# Altium PCB DoorSensor-Remote_Lora.PcbDoc
Units mil, origin at the board's own origin, x right, y up, seen from the top; angles counter-clockwise.
Board outline 1518.68 x 2938.43 mil, 2 copper layers (Top Layer, Bottom Layer); 34 components, 27 nets, 102 pads, 141 vias.
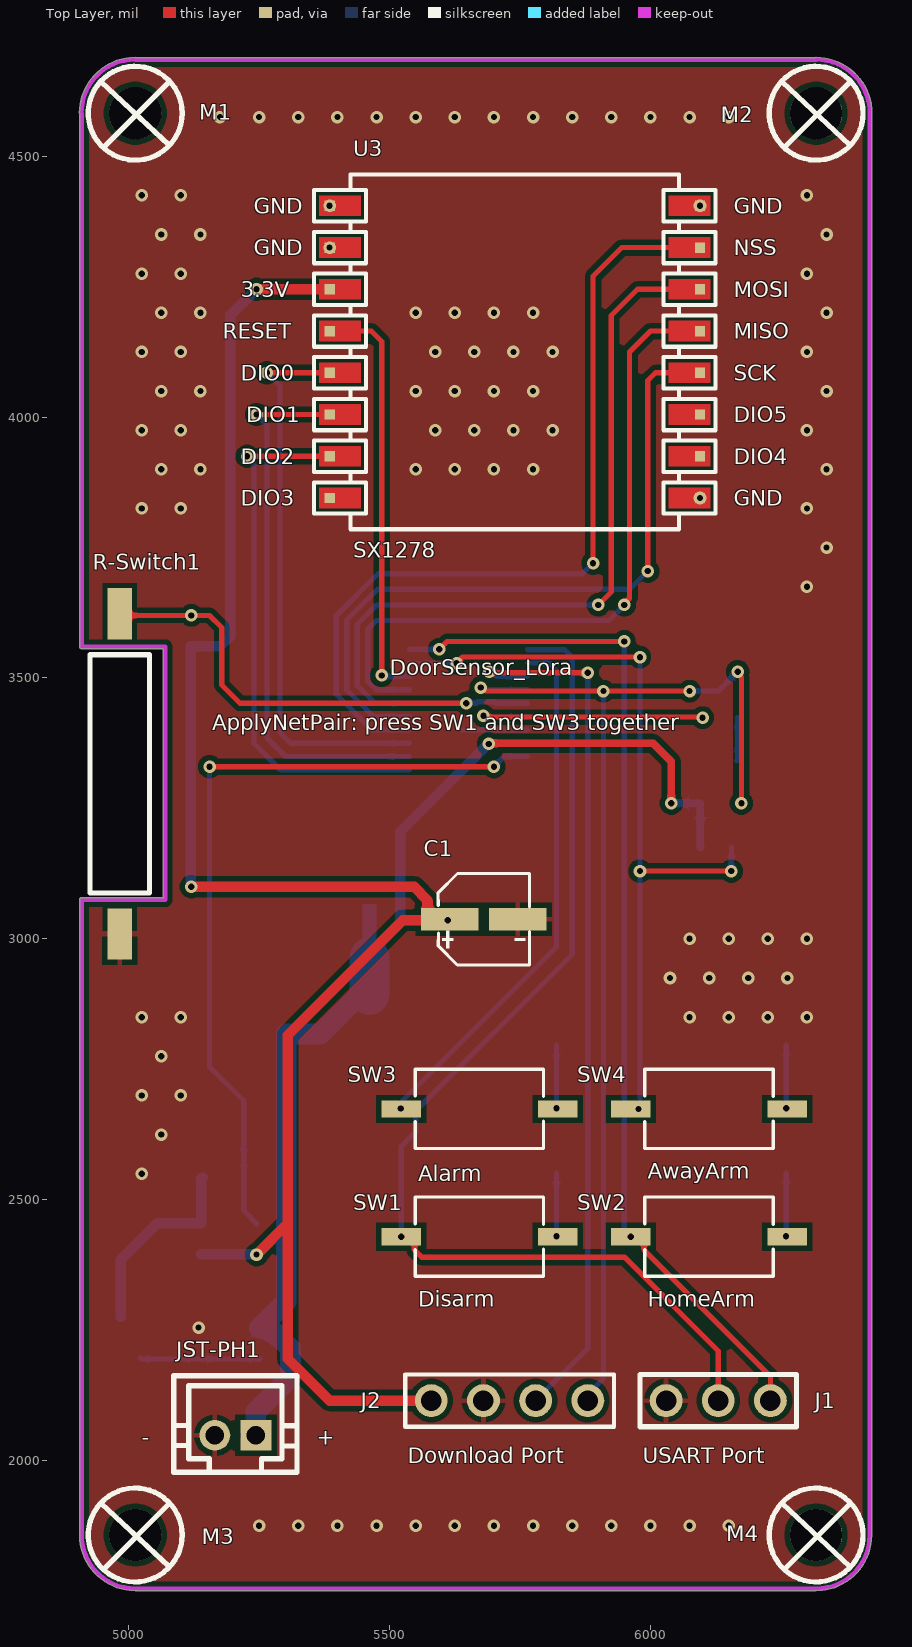
[diagram p0: Top Layer view]
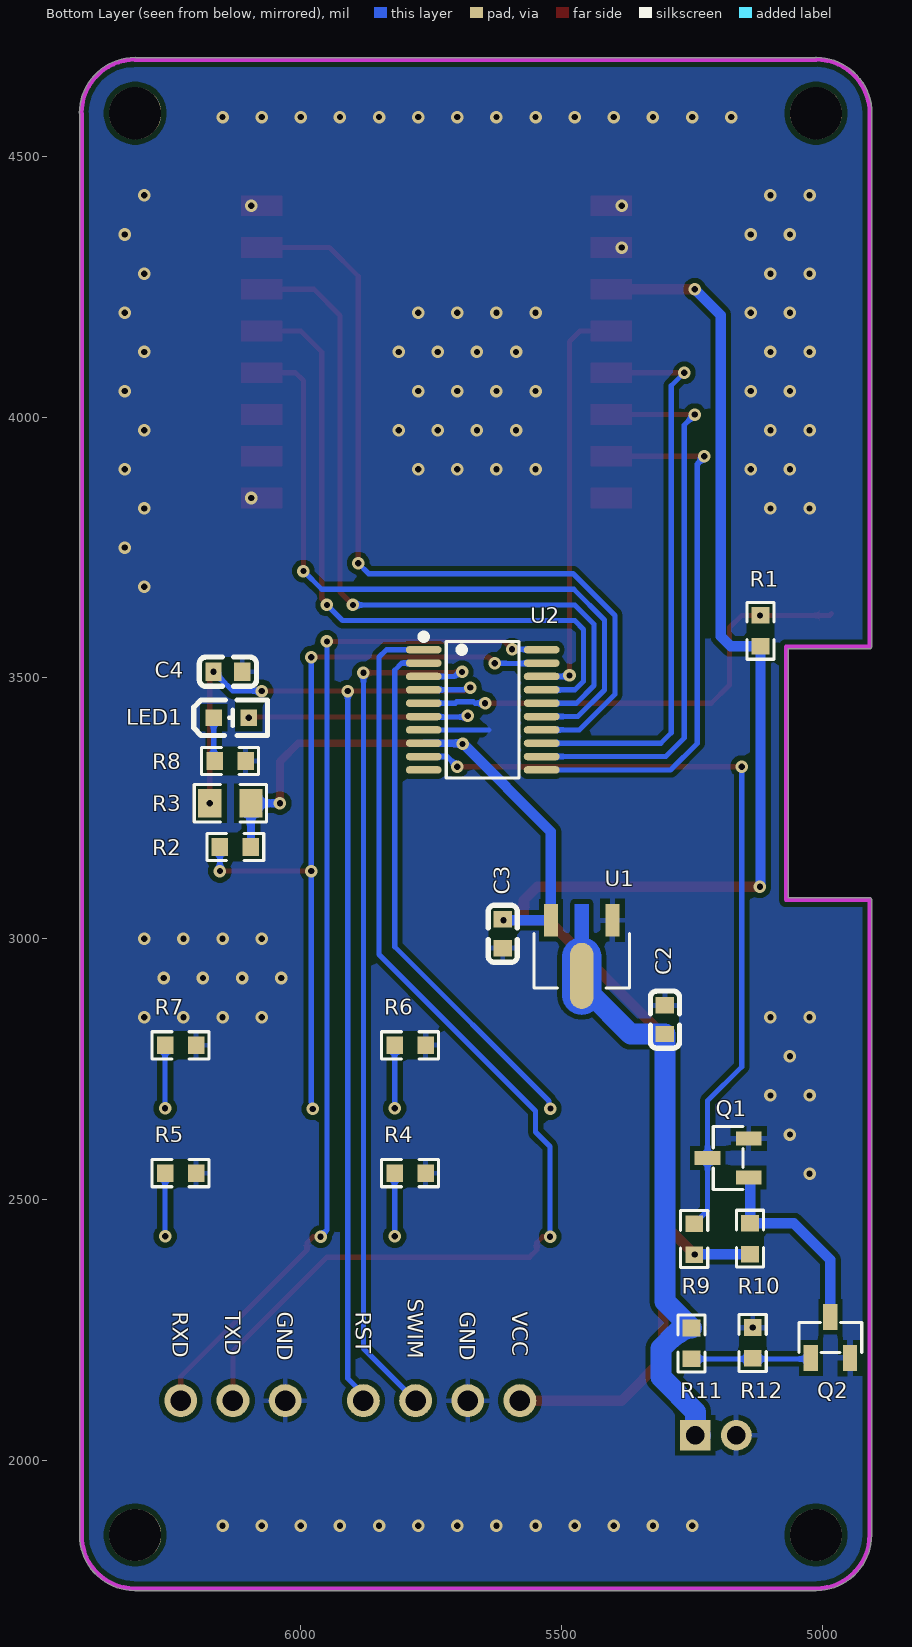
[diagram p1: Bottom Layer view, seen from below]
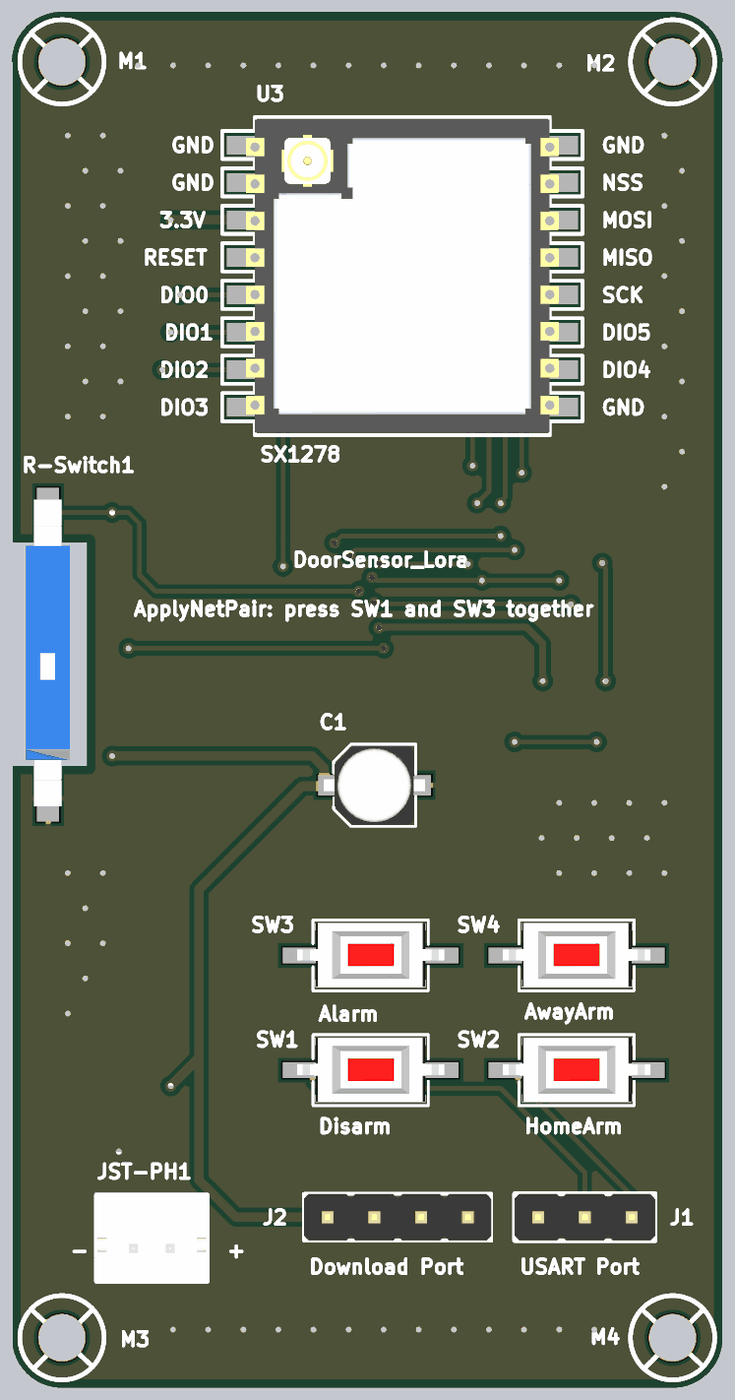
[diagram p2: 3D render of the assembled board from above, using the file's embedded part models]
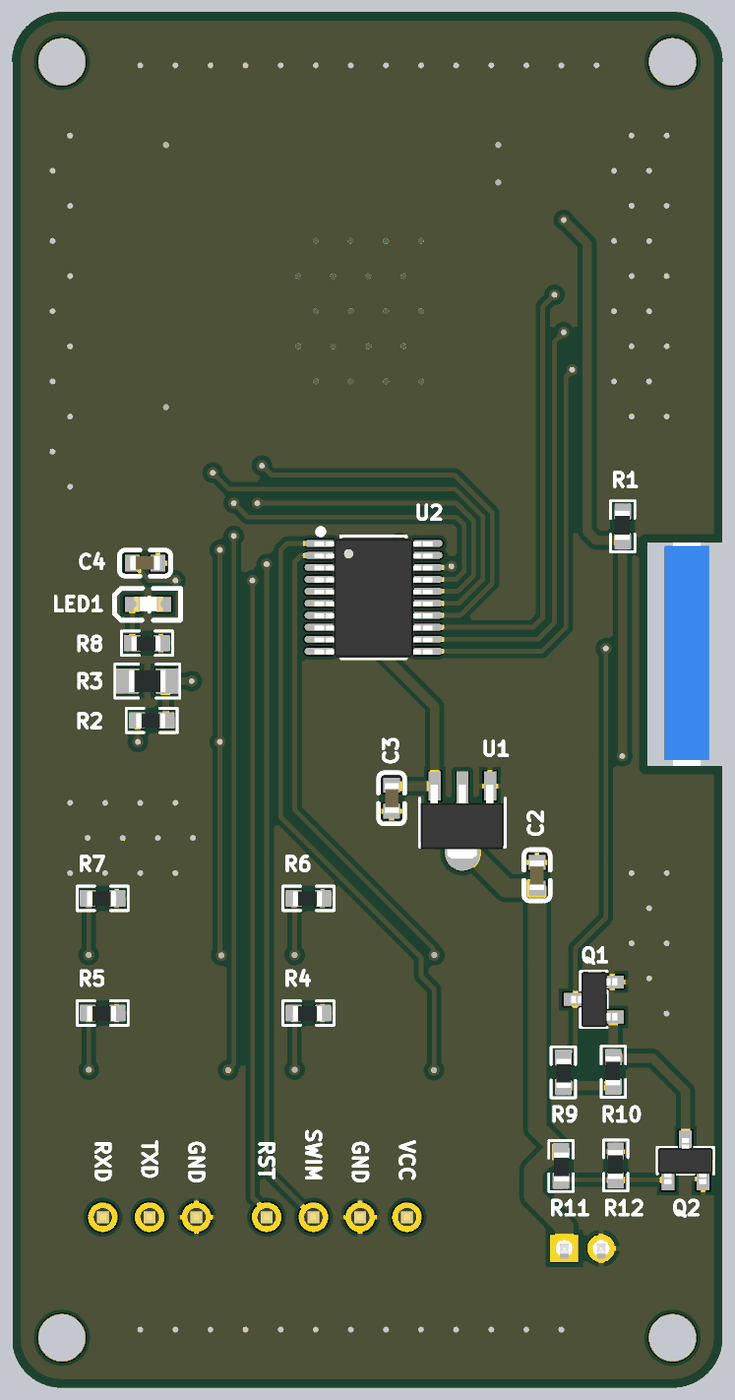
[diagram p3: 3D render of the assembled board from below, using the file's embedded part models]

## Layer stack, top to bottom
Top Solder: solder mask 0.4, Solder Resist, Dk 3.5
Top Layer: signal copper 1.4
Dielectric 1: dielectric 12.6, FR-4, Dk 4.8
Bottom Layer: signal copper 1.4
Bottom Solder: solder mask 0.4, Solder Resist, Dk 3.5

## Board outline
4905.98,1857.99 4905.98,3075 cw(c4910,3075) 4910,3079.01 5065.98,3079.01 5065.98,3555.99 4910,3555.99 cw(c4910,3560) 4905.98,3560 4905.98,4580.81 4905.61,4582.5 cw(c5012.5,4582.5) 5012.5,4689.39 5014.19,4689.02 6316.04,4689.02 6317.5,4689.29 cw(c6317.5,4582.5) 6424.29,4582.5 6424.01,4581.04 6424.02,1856.83 cw(c6318.17,1856.83) 6318.17,1750.98 5012.99,1750.99 5012.5,1750.95 cw(c5012.5,1857.5)

## Design rules (kind name [scope] priority, off if disabled: settings)
Clearance [All] p1: gap=10 ignorepadtopadclearanceinfootprint=FALSE except(0: Arc-Hole Track-Hole SMDPad-Hole THPad-Hole Via-Hole Fill-Hole Poly-Hole Region-Hole Text-Hole)
PolygonConnect PolygonConnect_Via [IsVia] p1: connectstyle=Direct reliefconductorwidth=10 reliefentries=4 polygonreliefangle="90 Angle" airgapwidth=10
PolygonConnect PolygonConnect_Pad [All] p2: connectstyle=Relief reliefconductorwidth=10 reliefentries=4 polygonreliefangle="90 Angle" airgapwidth=10
RoutingVias [All] p1: holewidth=28 width=50 viastyle="Through Hole" minholewidth=28 minwidth=50 maxholewidth=28 maxwidth=50
SolderMaskExpansion [All] p1: expansion=4 istentingtop=FALSE
Width GND [InNet('GND')] p1: maxlimit=50 minlimit=10 preferedwidth=40 minimp=50.000000 maximp=50.000000 favimp=50.000000
Width VCC [InNet('VCC')] p2: maxlimit=50 minlimit=10 preferedwidth=40 minimp=50.000000 maximp=50.000000 favimp=50.000000
Width [All] p3: maxlimit=50 minlimit=10 preferedwidth=10 minimp=50.000000 maximp=50.000000 favimp=50.000000
30 further rules are at their usual default settings.

## Components (designator, comment, footprint, x,y, rotation, side; value= is the part's Value field where it differs from the comment)
C1 "22uF/16V" C(Electrolytic)_SMD-D4.0mm_L5.4mm 5680,3035 r0 top
C2 "100nF" C0603 5300,2845 r270 bottom
C3 "100nF" C0603 5615,3010 r90 bottom
C4 "100nF" C0603 6140,3510 r0 bottom
J1 "PinHeader_3Pin" PinHeader_3Pin-2.54mm 6130,2115 r180 top
J2 "PinHeader_4Pin" PinHeader_4Pin-2.54mm 5730,2115 r180 top
JST-PH1 "JST-PH2.0_2Pin-TH-Vertical" Connector-JST-PH2.0-2Pin_TH-Vertical 5205,2055 r180 top
LED1 "D-0603" LED0603-Castellated 6130,3425 r180 bottom
M1 "PCB Mounting Hole" "PCB Mounting Hole" 5015,4580 r0 top
M2 "PCB Mounting Hole" "PCB Mounting Hole" 6320,4580 r0 top
M3 "PCB Mounting Hole" "PCB Mounting Hole" 5015,1855 r0 top
M4 "PCB Mounting Hole" "PCB Mounting Hole" 6320,1855 r0 top
Q1 "9014/SOT-23" SOT-23-3 5175,2580 r180 bottom
Q2 "9014/SOT-23" SOT-23-3 4985,2230 r270 bottom
R1 "1MΩ" R0603 5120,3590 r270 bottom
R2 "1MΩ" R0603 6125,3175 r180 bottom
R3 "10KΩ" R0805 6135,3260 r180 bottom
R4 "10KΩ" R0603 5790,2550 r180 bottom
R5 "10KΩ" R0603 6230,2550 r180 bottom
R6 "10KΩ" R0603 5790,2795 r180 bottom
R7 "10KΩ" R0603 6230,2795 r180 bottom
R8 "1KΩ" R0603 6135,3340 r180 bottom
R9 "1MΩ" R0603 5245,2425 r90 bottom
R10 "4.7MΩ" R0603 5140,2425 r270 bottom
R11 "10MΩ" R0603 5250,2225 r90 bottom
R12 "1.5MΩ" R0603 5135,2225 r270 bottom
R-Switch1 "CT10-G1" "Reed Switch_Molded-SMD_SPST" 4980,3315 r90 top
SW1 "CK_RS282G05A3" "Tactile Button_SMD-SPST_L6.1-W3.7-H2.5" 5670,2430 r180 top (schematic designator S1)
SW2 "CK_RS282G05A3" "Tactile Button_SMD-SPST_L6.1-W3.7-H2.5" 6110,2430 r180 top (schematic designator S2)
SW3 "CK_RS282G05A3" "Tactile Button_SMD-SPST_L6.1-W3.7-H2.5" 5670,2675 r180 top (schematic designator S3)
SW4 "CK_RS282G05A3" "Tactile Button_SMD-SPST_L6.1-W3.7-H2.5" 6110,2675 r180 top (schematic designator S4)
U1 "HT7333A" SOT89-3 5460,2985 r90 bottom
U2 "STM8L101" TSSOP-20_4.4x6.5mm_P0.65mm 5649.09,3440 r270 bottom
U3 "SX1278" "SX1278_RA-02-LORA MODULE_17X16MM" 5745,4125 r0 top

## Footprints (in the part's own frame and the unit in brackets; to place one, negate y for a bottom-side part, rotate by r counter-clockwise, add the part's x,y. Pads: shape width x height; smd on the part's side, far side on the other; paste and mask are expansions set on the pad)
C0603 [mm]
  rect 0.8x0.9 smd: 1(-0.707,-0.052) 2(0.693,-0.052)
  silkscreen extent -1.4,-0.76 1.38,0.66, body extent -0.8,-0.46 0.8,0.34, height 0.8
C(Electrolytic)_SMD-D4.0mm_L5.4mm [mm]
  rect 2.8x1.1 smd: 1(-1.648,0.067) 2(1.673,0.067)
  silkscreen extent -2.2,-2.16 2.25,2.29, body extent -2.75,-2.09 2.75,2.21, height 5.4
Connector-JST-PH2.0-2Pin_TH-Vertical [mm] "Wire to Board Connector, Direct Insert Push-Pull, P=2mm,"
  rect 1.5x1.5 hole 0.9 paste-2539.97 mask+0.05: 1(-0.988,0.166)
  round 1.5 hole 0.9 paste-2539.97 mask+0.05: 2(1.012,0.166)
  silkscreen extent -2.99,-2.73 3.01,1.97, body extent -2.94,-2.63 2.96,1.92, height 6
LED0603-Castellated [mil]
  rect 31.5x31.5 smd: 1(30,-1) 2(-37,-1)
  silkscreen extent -75,-35 66,33, body extent -34,-16 29,16, height 43
"PCB Mounting Hole" [mil]
  round 100 hole 100 paste-99999 mask+4: 1(-2.5,2.5)
  silkscreen extent -92,-87 88,92
PinHeader_3Pin-2.54mm [mm]
  round 1.6 hole 1: 1(-2.54,0)
  round 1.6 hole 1 paste-2539.97: 2(0,0) 3(2.54,0)
  silkscreen extent -3.81,-1.27 3.81,1.27, body extent -3.81,-1.27 3.81,1.27, height 8.54
PinHeader_4Pin-2.54mm [mm]
  round 1.6 hole 1: 1(-3.81,0) 2(-1.27,0) 3(1.27,0) 4(3.81,0)
  silkscreen extent -5.08,-1.27 5.08,1.27, body extent -5.08,-1.27 5.08,1.27, height 8.54
R0603 [mil]
  rect 31.75x34.02 smd paste-3937.01 mask+2: 1(-30.13,1.01) 2(29.19,1.01)
  silkscreen extent -55,-25 54,27, body extent -34,-16 29,16, height 18
R0805 [mm]
  rect 1.133x1.377 smd paste-100 mask+0.051: 1(-1,0) 2(1,0)
  silkscreen extent -1.76,-0.92 1.76,0.92, body extent -1,-0.6 1,0.6, height 0.45
"Reed Switch_Molded-SMD_SPST" [mm] "Gull-Wing, overmolded SMD Reed Switch 11.43mm x 2.29mm x 2.29mm(G1)"
  rect 2.5x1.2 smd: 1(-7.767,-0.074) 2(7.833,-0.074)
  silkscreen extent -5.77,-1.52 5.83,1.38, body extent -8.18,-1.26 8.44,1.14, height 2.9
SOT89-3 [mm]
  rect 1.575x0.672 smd: 1(1.287,-1.46) 3(1.287,1.54)
  oval 3.226x1.14 smd: 2(-1.425,0.04)
  Top Layer region: -2.352,0.99 -0.498,0.99 -0.454,0.989 -0.409,0.986 -0.365,0.98 -0.321,0.973 -0.277,0.964 -0.234,0.953 -0.192,0.939 -0.15,0.924 -0.109,0.907 -0.069,0.887 -0.03,0.866 0.009,0.843 0.046,0.819 0.082,0.792 0.116,0.764 0.15,0.735 0.182,0.704 0.212,0.671 0.241,0.637 0.268,0.602 0.293,0.565 0.317,0.528 0.339,0.489 0.359,0.449 0.377,0.37 2.075,0.37 2.075,-0.29 0.377,-0.29 0.359,-0.369 0.339,-0.409 0.317,-0.448 0.293,-0.486 0.268,-0.522 0.241,-0.557 0.212,-0.591 0.182,-0.624 0.15,-0.655 0.116,-0.685 0.082,-0.713 0.046,-0.739 0.009,-0.764 -0.03,-0.787 -0.069,-0.808 -0.109,-0.827 -0.15,-0.844 -0.192,-0.859 -0.234,-0.873 -0.277,-0.884 -0.321,-0.893 -0.365,-0.901 -0.409,-0.906 -0.454,-0.909 -0.498,-0.91 -2.352,-0.91 -2.397,-0.909 -2.441,-0.906 -2.485,-0.901 -2.529,-0.893 -2.573,-0.884 -2.616,-0.873 -2.659,-0.859 -2.7,-0.844 -2.741,-0.827 -2.782,-0.808 -2.821,-0.787 -2.859,-0.764 -2.896,-0.739 -2.932,-0.713 -2.967,-0.685 -3,-0.655 -3.032,-0.624 -3.062,-0.591 -3.091,-0.557 -3.118,-0.522 -3.144,-0.486 -3.167,-0.448 -3.189,-0.409 -3.21,-0.369 -3.228,-0.329 -3.244,-0.287 -3.258,-0.245 -3.271,-0.202 -3.281,-0.159 -3.29,-0.115 -3.296,-0.071 -3.3,-0.027 -3.302,0.018 -3.302,0.062 -3.3,0.107 -3.296,0.151 -3.29,0.195 -3.281,0.239 -3.271,0.282 -3.258,0.325 -3.244,0.367 -3.228,0.409 -3.21,0.449 -3.189,0.489 -3.167,0.528 -3.144,0.565 -3.118,0.602 -3.091,0.637 -3.062,0.671 -3.032,0.704 -3,0.735 -2.967,0.764 -2.932,0.792 -2.896,0.819 -2.859,0.843 -2.821,0.866 -2.782,0.887 -2.741,0.907 -2.7,0.924 -2.659,0.939 -2.616,0.953 -2.573,0.964 -2.529,0.973 -2.485,0.98 -2.441,0.986 -2.397,0.989 -2.352,0.99
  silkscreen extent -2.02,-2.29 0.63,2.37, body extent -2.64,-2.19 1.37,2.31, height 1.52
SOT-23-3 [mm]
  rect 1.25x0.7 smd: 1(0.847,-0.948) 2(0.847,0.952) 3(-1.153,0.002)
  silkscreen extent -0.88,-1.52 0.57,1.53, body extent -1.38,-1.5 1.12,1.5, height 1.2
"SX1278_RA-02-LORA MODULE_17X16MM" [mil]
  rect 20x20 smd mask+0: 1(-360,280) 2(-360,200) 3(-360,120) 4(-360,40) 5(-360,-40) 6(-360,-120) 7(-360,-200) 8(-360,-280) 9(350,-280) 10(350,-200) 11(350,-120) 12(350,-40) 13(350,40) 14(350,120) 15(350,200) 16(350,280)
  Top Layer region: -380,-300 -300,-300 -300,-260 -380,-260
  Top Layer region: -380,-220 -300,-220 -300,-180 -380,-180
  Top Layer region: -380,-140 -300,-140 -300,-100 -380,-100
  Top Layer region: -380,-60 -300,-60 -300,-20 -380,-20
  Top Layer region: -380,20 -300,20 -300,60 -380,60
  Top Layer region: -380,100 -300,100 -300,140 -380,140
  Top Layer region: -380,180 -300,180 -300,220 -380,220
  Top Layer region: -380,260 -300,260 -300,300 -380,300
  Top Layer region: 290,-300 370,-300 370,-260 290,-260
  Top Layer region: 290,-220 370,-220 370,-180 290,-180
  Top Layer region: 290,-140 370,-140 370,-100 290,-100
  Top Layer region: 290,-60 370,-60 370,-20 290,-20
  Top Layer region: 290,20 370,20 370,60 290,60
  Top Layer region: 290,100 370,100 370,140 290,140
  Top Layer region: 290,180 370,180 370,220 290,220
  Top Layer region: 290,260 370,260 370,300 290,300
  silkscreen extent -390,-340 380,340, body extent -340,-335 330,335, height 130
"Tactile Button_SMD-SPST_L6.1-W3.7-H2.5" [mm] "3x6x2.5mm, 2Pin"
  rect 1.92x0.84 smd: 1(3.754,0.021) 2(-3.866,0.021)
  silkscreen extent -3.18,-1.91 3.07,1.95, body extent -4.06,-1.75 3.94,1.75, height 2.5
TSSOP-20_4.4x6.5mm_P0.65mm [mil]
  oval 14.33x68.58 smd: 1(-114.12,-115.39) 2(-88.53,-115.39) 3(-62.94,-115.39) 4(-37.35,-115.39) 5(-11.75,-115.39) 6(13.84,-115.39) 7(39.43,-115.39) 8(65.02,-115.39) 9(90.61,-115.39) 10(116.2,-115.39) 11(116.2,110.67) 12(90.61,110.67) 13(65.02,110.67) 14(39.43,110.67) 15(13.84,110.67) 16(-11.75,110.67) 17(-37.35,110.67) 18(-62.94,110.67) 19(-88.53,110.67) 20(-114.12,110.67)
  silkscreen extent -145,-121 132,67, body extent -125,-128 130,123, height 47

## Part data
C1: library part Capacitor_Electrolytic-SMD-D4.0xL5.4mm
C2 C3 C4: library part Capacitor_0603
J1 J2: "Straight Single Row, Square Pitch, 2.54mm"
LED1: library part LED_0603
M1 M2 M3 M4: "Mounting Hole"
Q1 Q2: library part NPN_SOT-23-3
R1 R2 R4 R5 R6 R7 R8 R9 R10 R11 R12: library part Resistor_0603
R3: library part Resistor_0805
R-Switch1: library part Reed-Switch_Molded-SMD
SW1 SW2 SW3 SW4: library part Button_Push_2Pin_SMD
U1: library part LDO_SOT89-3
U2: library part STM8L101_TSSOP-20, "4.4x6.5mm_P0.65mm"
U3: library part "SX1278_Ra-02-Lora Module", "17x16mm"

## Via types
v1: diameter 24, hole 12, Top Layer to Bottom Layer, tented both sides, 141 vias

## Nets (pads, with @x,y where several pads share a name; then routed paths per layer and width w, separated by ;. In a path a pad name is that pad's centre, name@x,y a point inside that pad or via, vN(x,y) a via of type N, cw(c..) or ccw(c..) an arc to the next point about the centre after c; other vN are vias at no path point)
BAT: C2.2 JST-PH1.1 R11.2 U1.2 | length 1068.4
  Bottom Layer w40: JST-PH1.1@5233.9,2048.47 5243.43,2058 5243.43,2093.43 5310,2160 5310,2215 R11.2@5264.93,2260.07 ; R11.2 5302.05,2305.23 C2.2 5367.72,2817.72 5448.66,2898.66 5459.32,2898.66 5461.57,2900.92 U1.2
D0: U2.13 U3.5 | length 1077.1
  Top Layer w10: v1(5265,4085) U3.5
  Bottom Layer w10: v1(5265,4085) 5290,4060 5290,3395 5310.02,3374.98 U2.13
D1: U2.12 U3.6 | length 1056.5
  Top Layer w10: v1(5245,4005) U3.6
  Bottom Layer w10: v1(5245,4005) 5265,3985 5265,3385 5300.61,3349.39 U2.12
D2: U2.11 U3.7 | length 1033
  Top Layer w10: v1(5227,3925) U3.7
  Bottom Layer w10: v1(5227,3925) 5227,3923 5240,3910 5240,3375 5291.2,3323.8 U2.11
GND: C1.2 C2.1 C3.1 C4.1 J1.3 J2.3 JST-PH1.2 Q1.2 Q2.2 R4.2 R5.2 R6.2 R7.2 R8.2 R12.1 R-Switch1.1 U1.1 U2.7 U3.1 U3.2 U3.9 U3.16 | length 124.8
  Bottom Layer w10: 5639.71,3400.57 U2.7
  other v1: 5250,1875 5325,1875 5400,1875 5475,1875 5550,1875 5625,1875 5700,1875 5775,1875 5850,1875 5925,1875 6000,1875 6075,1875 6150,1875 5133.99,2255.13 5025,2550 5062.5,2625 5025,2700 5100,2700 5062.5,2775 5025,2850 5100,2850 6075,2850 6150,2850 6225,2850 6300,2850 6037.5,2925 6112.5,2925 6187.5,2925 6262.5,2925 6075,3000 6150,3000 6225,3000 6300,3000 6300,3675 6337.5,3750 5025,3825 5100,3825 6300,3825 6095,3845 5062.5,3900 5137.5,3900 5550,3900 5625,3900 5700,3900 5775,3900 6337.5,3900 5025,3975 5100,3975 5587.5,3975 5662.5,3975 5737.5,3975 5812.5,3975 6300,3975 5062.5,4050 5137.5,4050 5550,4050 5625,4050 5700,4050 5775,4050 6337.5,4050 5025,4125 5100,4125 5587.5,4125 5662.5,4125 5737.5,4125 5812.5,4125 6300,4125 5062.5,4200 5137.5,4200 5550,4200 5625,4200 5700,4200 5775,4200 6337.5,4200 5025,4275 5100,4275 6300,4275 5385,4325 5062.5,4350 5137.5,4350 6337.5,4350 5385,4405 6095,4405 5025,4425 5100,4425 6300,4425 5175,4575 5250,4575 5325,4575 5400,4575 5475,4575 5550,4575 5625,4575 5700,4575 5775,4575 5850,4575 5925,4575 6000,4575 6075,4575 6150,4575
KEY1: J1.2 SW1.1 U2.1 | length 2139.8
  Top Layer w10: v1(5522.2,2429.16) 5536.35,2429.16 5547.88,2417.63 5547.88,2403.49 5561.37,2390 5950,2390 6130,2210 J1.2
  Bottom Layer w10: v1(5522.2,2429.16) 5522.2,2602.2 5550,2630 5550,2670 5850,2970 5850,3540 5835.88,3554.12 U2.1
KEY2: J1.1 SW2.1 U2.20 | length 1997.4
  Top Layer w10: v1(5595,3555) 5610,3570 v1(5950,3570) ; v1(5962.2,2429.16) 5976.35,2429.16 5987.88,2417.63 5987.88,2403.49 6230,2161.37 J1.1
  Bottom Layer w10: U2.20 5539.25,3554.95 5569.43,3554.95 5569.49,3555 v1(5595,3555) ; v1(5950,3570) 5950,2442.02 5962.2,2429.82 v1(5962.2,2429.16)
KEY3: SW3.1 U2.2 | length 1025
  Bottom Layer w10: v1(5521.59,2674.78) 5524.27,2677.45 5524.27,2689.27 5820,2985 5820,3515 5806.47,3528.53 U2.2
KEY4: R2.1 SW4.1 U2.19 | length 1534.9
  Top Layer w10: v1(5628.43,3528.43) 5640,3540 v1(5980,3540) ; v1(5980,3130) v1(6155,3130)
  Bottom Layer w10: U2.19 5538.95,3528 5606.18,3528 5606.61,3528.43 v1(5628.43,3528.43) ; v1(5977,2674.16) 5979.68,2676.84 5979.68,2686.84 5980,2687.16 v1(5980,3540) ; v1(6155,3130) 6155.13,3130.13 R2.1
LED2: LED1.1 U2.6 | length 507.5
  Top Layer w10: v1(5680,3427.57) 5682.57,3425 6099,3425 v1(6100,3424)
  Bottom Layer w10: v1(5680,3427.57) 5682.57,3425 5733.13,3425 5733.46,3425.33 5763.65,3425.33 U2.6
Lora_NRST: U2.18 U3.4 | length 802.6
  Top Layer w10: U3.4 5465,4165 5485,4145 v1(5485,3505)
  Bottom Layer w10: v1(5485,3505) 5487.06,3502.94 U2.18
MISO: U2.17 U3.13 | length 1338.6
  Top Layer w10: v1(5950,3640) 5950,3642.86 5960,3652.86 5960,4125 6000,4165 U3.13
  Bottom Layer w10: U2.17 5474.47,3477.35 5458,3493.82 5458,3593 5475,3610 5920,3610 v1(5950,3640)
MOSI: U2.16 U3.14 | length 1465.3
  Top Layer w10: v1(5900,3640) 5925,3665 5925,4195 5975,4245 U3.14
  Bottom Layer w10: U2.16 5471.78,3451.75 5438,3485.53 5438,3603 5475,3640 v1(5900,3640)
NetLED1_2: LED1.2 R8.1 | length 83.8
  Bottom Layer w10: R8.1 6167,3342.88 LED1.2
NetQ1_1: Q1.1 Q2.3 R10.1 | length 381.3
  Bottom Layer w20: Q2.3 4984.91,2384.91 5055.13,2455.13 R10.1 5138.99,2540.03 Q1.1
NetQ2_1: Q2.1 R11.1 R12.2 | length 229.4
  Bottom Layer w10: Q2.1 5024.1,2194.87 R11.1
NetR4_1: R4.1 SW1.2 | length 121.1
  Bottom Layer w10: v1(5820,2430) 5820.13,2430.13 R4.1
NetR5_1: R5.1 SW2.2 | length 121.1
  Bottom Layer w10: v1(6260,2430) 6260.13,2430.13 R5.1
NetR6_1: R6.1 SW3.2 | length 121.1
  Bottom Layer w10: v1@5820,2675 v1(5820.13,2675.13) R6.1
NetR7_1: R7.1 SW4.2 | length 121.1
  Bottom Layer w10: v1@6260,2675 v1(6260.13,2675.13) R7.1
NSS: U2.14 U3.15 | length 1630.7
  Top Layer w10: v1(5890,3720) 5890,4270 5945,4325 U3.15
  Bottom Layer w10: U2.14 5466.39,3400.57 5398,3468.96 5398,3619.57 5478.43,3700 5870,3700 v1(5890,3720)
Reed: R1.1 R-Switch1.2 U2.5 | length 920.6
  Top Layer w10: R-Switch1.2 4986.3,3620 5155,3620 5178.25,3596.75 5178.25,3486.75 5213.25,3451.75 v1(5646.75,3451.75)
  Bottom Layer w10: R1.1 R1.1@5120.12,3620.13 ; v1(5646.75,3451.75) 5666,3451.75 5668.82,3454.57 5701.18,3454.57 5704,3451.75 U2.5
  other v1: 5120,3620
RST: C4.2 J2.1 R3.1 U2.4 | length 2233.1
  Top Layer w10: v1(5675,3481.57) 5678.79,3481.57 5685.36,3475 v1(5910,3475) v1(6075,3475) ; v1(6167.28,3512.05) 6167.28,3508.26 6174.37,3501.17 v1(6174.37,3260)
  Bottom Layer w10: v1(5675,3481.57) 5677.68,3478.89 5686.32,3478.89 5687.86,3477.35 U2.4 ; J2.1 5880,2127.35 5910,2157.35 v1(5910,3475) ; v1(6075,3475) 6130.23,3475 6154.56,3499.33 6156.53,3499.33 6167.28,3510.08 v1(6167.28,3512.05) C4.2@6169.37,3514.14
SCK: U2.15 U3.12 | length 1362.6
  Top Layer w10: v1(5995,3705) 5995,4070 6010,4085 U3.12
  Bottom Layer w10: U2.15 5469.09,3426.16 5418,3477.25 5418,3611.28 5476.72,3670 5960,3670 v1(5995,3705)
SWIM: J2.2 U2.3 | length 1703.5
  Top Layer w10: v1(5690.87,3511.64) 5692.51,3510 v1(5880,3510)
  Bottom Layer w10: v1(5690.87,3511.64) 5693.54,3508.96 5699.36,3508.96 5705.38,3502.94 U2.3 ; J2.2 5880,2215 v1(5880,3510)
VCC: C1.1 C3.2 J2.4 R1.2 R2.2 R3.2 R9.1 R10.2 U1.3 U2.8 U3.3 | length 4558.5
  Top Layer w15: v1(5690,3373.57) 5691.43,3375 6005,3375 6040,3340 v1(6040,3260)
  Top Layer w20: v1(5120,3100) 5547.02,3100 5572.65,3074.38 5572.65,3049.3 C1.1@5586.27,3035.68 ; v1(5245,2395) 5305,2455 ; v1(5245,4245) U3.3 ; J2.4 5385,2115 5305,2195 5305,2455 ; v1(5611.35,3035.68) C1.1@5586.27,3035.68 ; 5305,2455 5305,2815 5525.68,3035.68 C1.1@5586.27,3035.68
  Bottom Layer w15: v1(5690,3373.57) 5690.02,3374.98 U2.8 ; v1(6040,3260) R3.2 6095.63,3176.19 R2.2
  Bottom Layer w20: v1(5120,3100) 5120,3101.08 5118.99,3102.09 R1.2 5175.81,3560.81 5195,3580 5195,4195 v1(5245,4245) ; R10.2 R9.1@5245.07,2395.81 ; C3.2 v1(5611.35,3035.68) U1.3 5520.63,3205.63 v1@5690,3375
Voltage_Low: Q1.3 R9.2 U2.9 | length 1531.7
  Top Layer w10: v1(5155,3330) v1(5700,3330)
  Bottom Layer w10: v1(5155,3330) 5155,2755 5220.39,2689.61 Q1.3 5220.39,2479.81 5234,2466.2 5234,2465.07 5244.88,2454.19 R9.2 ; v1(5700,3330) 5719.39,3349.39 U2.9
pads on no net: M1.1 M2.1 M3.1 M4.1 U2.10 U3.8 U3.10 U3.11

## Polygon pours and split planes (outlines as drawn)
GND on Bottom Layer "GND_L02_P001" (solid, remove dead copper, pour order 1): 6420,4695 4905,4695 4895,4685 4895,1740 6430,1740
GND on Top Layer "GND_L01_P000" (solid, remove dead copper, pour order 0): 4910,4695 6430,4695 6430,1720 6405,1745 4895,1745

## Keep-outs
Keep-Out Layer:
  lines w8: 4909.63,4582.5 cw(c5012.5,4582.5) 5012.5,4685.37 ; 4909.97,1857.5 ccw(c5012.5,1857.5) 5012.5,1754.97 ; 4910,1857.5 4910,3075 5070,3075 5070,3560 4910,3560 4910,4582.5 ; 5012.5,1755 6318.17,1755 ccw(c6318.17,1856.83) 6420,1856.83 6420,4582.5 ; 5012.5,4685 6317.5,4685 ; 6317.5,4685.27 cw(c6317.5,4582.5) 6420.27,4582.5

## Silkscreen, mask and mechanical layers (free items; w line width, h text height)
Top Overlay:
  text "DoorSensor_Lora" at 5500,3505 h30
  text "ApplyNetPair: press SW1 and SW3 together" at 5160,3400 h30
  text "AwayArm" at 5995,2540 h30
  text "Alarm" at 5555,2535 h30
  text "Disarm" at 5555,2295 h30
  text "HomeArm" at 5995,2295 h30
  text "-" at 5025,2030 h30
  text "+" at 5360,2030 h30
  text "Download Port" at 5535,1995 h30
  text "USART Port" at 5985,1995 h30
Bottom Overlay:
  text "SWIM" at 5795,2310 h30 r90
  text "VCC" at 5595,2285 h30 r90
  text "GND" at 5695,2285 h30 r90
  text "RST" at 5895,2285 h30 r90
  text "GND" at 6045,2285 h30 r90
  text "TXD" at 6145,2285 h30 r90
  text "RXD" at 6245,2285 h30 r90

## Text inside footprints (layer, text, board x,y; h text height)
U3: Top Overlay "GND" at 5240,4390 h30; Top Overlay "GND" at 5240,4310 h30; Top Overlay "3.3V" at 5215,4230 h30; Top Overlay "RESET" at 5180,4150 h30; Top Overlay "DIO0" at 5215,4070 h30; Top Overlay "DIO1" at 5225,3990 h30; Top Overlay "DIO2" at 5215,3910 h30; Top Overlay "DIO3" at 5215,3830 h30; Top Overlay "GND" at 6160,4390 h30; Top Overlay "NSS" at 6160,4310 h30; Top Overlay "MOSI" at 6160,4230 h30; Top Overlay "MISO" at 6160,4150 h30; Top Overlay "SCK" at 6160,4070 h30; Top Overlay "DIO5" at 6160,3990 h30; Top Overlay "DIO4" at 6160,3910 h30; Top Overlay "GND" at 6160,3830 h30